# Altium PCB ADG904_pcb.PcbDoc
Units mm, origin at the board's own origin, x right, y up, seen from the top; angles counter-clockwise.
Board outline 13.4 x 13.4 mm, 4 copper layers (Top Layer, Layer 1, Layer 2, Bottom Layer 1), stack 0.775 mm thick; 9 components, 8 nets, 38 pads, 55 vias.
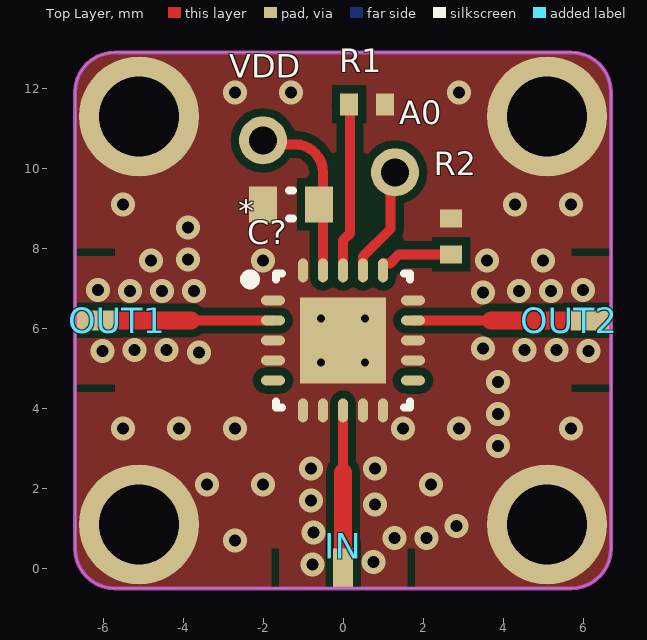
[diagram p0: Top Layer view]
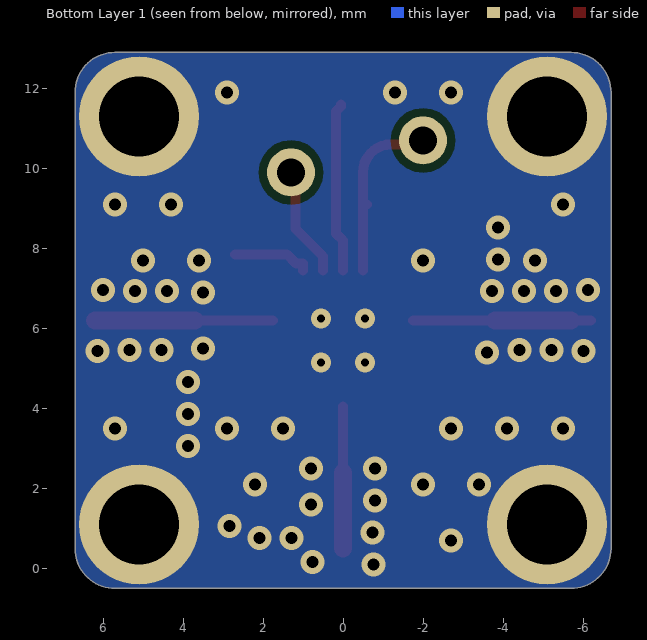
[diagram p1: Bottom Layer 1 view, seen from below]
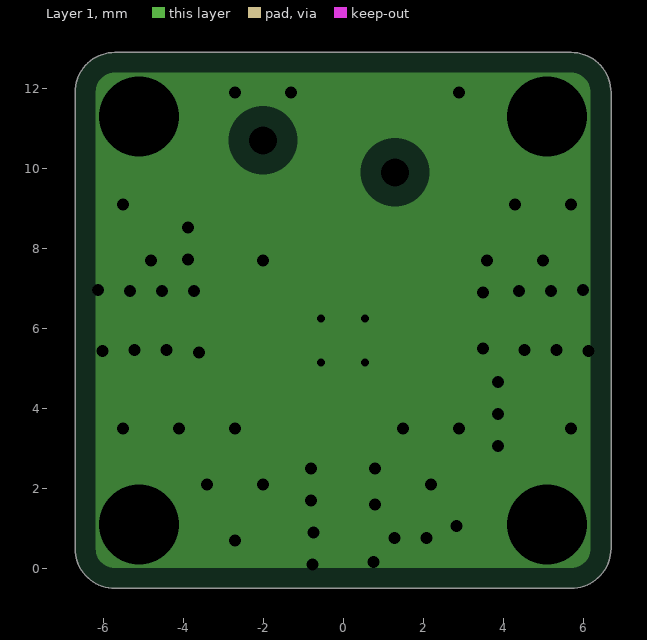
[diagram p2: Layer 1, clearances drawn from the general rule]
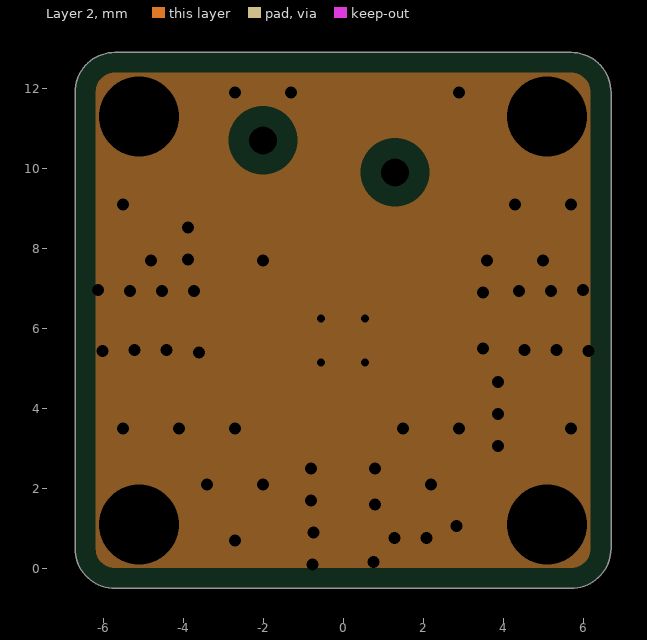
[diagram p3: Layer 2, clearances drawn from the general rule]

## Layer stack, top to bottom
Top Solder: solder mask 0.0102, Solder Resist, Dk 3.5
Top Layer: signal copper 0.035
Dielectric 2: prepreg 0.254, PP-006, Dk 4.1
Layer 1: plane copper 0.035, net GND
Dielectric 1: dielectric 0.127, FR-4, Dk 4.8
Layer 2: plane copper 0.035, net GND
Dielectric 3: prepreg 0.254, PP-006, Dk 4.1
Bottom Layer 1: signal copper 0.035
Bottom Solder: solder mask 0.0102, Solder Resist, Dk 3.5

## Board outline
-6.7,0.5 -6.7,11.9 cw(c-5.7,11.9) -5.7,12.9 5.7,12.9 cw(c5.7,11.9) 6.7,11.9 6.7,0.5 cw(c5.7,0.5) 5.7,-0.5 -5.7,-0.5 cw(c-5.7,0.5)

## Design rules (kind name [scope] priority, off if disabled: settings)
Clearance [All] p1: gap=0.2 ignorepadtopadclearanceinfootprint=FALSE
HoleSize [All] p1: absolutevalues=TRUE maxlimit=5 minlimit=0.3 maxpercent=80.000 minpercent=20.000
PlaneClearance [All] p1: clearance=0.508
PlaneConnect [All] p1: planeconnectstyle=Direct reliefexpansion=0.508 reliefentries=4 reliefconductorwidth=0.254 reliefairgap=0.254
PolygonConnect [All] p1: connectstyle=Direct reliefconductorwidth=0.254 reliefentries=4 polygonreliefangle="90 Angle" airgapwidth=0.254
RoutingVias [All] p1: holewidth=0.711 width=1.27 viastyle="Through Hole" minholewidth=0.711 minwidth=1.27 maxholewidth=0.711 maxwidth=1.27 useviatemplates=TRUE viatemplateguid#1={4417187F-98E7-48E9-A77D-D507A8F96CD3} viatemplatename#1=v60h30m0mx0
SolderMaskExpansion [All] p1: expansion=0.102
Width Width_50ohm [InNetClass('50ohm')] p1: maxlimit=0.45 minlimit=0.45 preferedwidth=0.45 impedanceprofiledriven=TRUE impedanceprofileid={D2B77361-9B7D-4BD5-B69E-70E315500705} impedanceprofilevalue=50.000000 minimp=50.000000 maximp=50.000000 favimp=50.000000 checkconnectedcopper=TRUE
Width [All] p2: maxlimit=5 minlimit=0.2 preferedwidth=0.2
27 further rules are at their usual default settings.

## Components (designator, comment, footprint, x,y, rotation, side; value= is the part's Value field where it differs from the comment)
* "ADG904BCPZ" QFN50P400X400X80_HS-21N 0,5.7 r0 top
A0 "" "New footprint 1" 1.3,9.9 r0 top
C? "10uF" CAPC0603(1608)55_L -1.3,9.1 r180 top
IN "X-CONNECTOR" X-CONNECTOR-PCB -5.1,1.1 r90 top
OUT1 "X-CONNECTOR" X-CONNECTOR-PCB -5.1,11.3 r0 top
OUT2 "X-CONNECTOR" X-CONNECTOR-PCB 5.1,1.1 r180 top
R1 "4K7" 0402-RES-HD 0.6,11.6 r0 top value=4.7K
R2 "4K7" 0402-RES-HD 2.7,8.3 r90 top value=4.7K
VDD "" "New footprint 1" -2,10.7 r90 top

## Footprints (in the part's own frame and the unit in brackets; to place one, negate y for a bottom-side part, rotate by r counter-clockwise, add the part's x,y. Pads: shape width x height; smd on the part's side, far side on the other; paste and mask are expansions set on the pad)
0402-RES-HD [mm] "Chip Resistor, Body 1.0x0.5mm, IPC High Density"
  rect 0.45x0.55 smd: 1(-0.45,0) 2(0.45,0)
  body extent -0.52,-0.27 0.53,0.28, height 0.4
CAPC0603(1608)55_L [mm] "Chip Capacitor, Body 1.6x0.8mm, Height 0.55mm, IPC High Density"
  rect 0.7x0.9 smd: 1(-0.7,0) 2(0.7,0)
  silkscreen extent -0.05,-0.35 0.05,0.35, body extent -0.87,-0.47 0.88,0.48, height 0.55
"New footprint 1" [mm]
  round 1.2 hole 0.7: 1(0,0)
QFN50P400X400X80_HS-21N [mm] "QFN, 20-Leads, Body 4,00x4,00mm, Pitch 0,50mm, Thermal Pad 2,15x2,15mm, IPC Medium Density"
  oval 0.6x0.25 smd: 1(-1.75,1) 2(-1.75,0.5) 3(-1.75,0) 4(-1.75,-0.5) 5(-1.75,-1) 11(1.75,-1) 12(1.75,-0.5) 13(1.75,0) 14(1.75,0.5) 15(1.75,1)
  oval 0.25x0.6 smd: 6(-1,-1.75) 7(-0.5,-1.75) 8(0,-1.75) 9(0.5,-1.75) 10(1,-1.75) 16(1,1.75) 17(0.5,1.75) 18(0,1.75) 19(-0.5,1.75) 20(-1,1.75)
  rect 2.15x2.15 smd: 21(0,0)
  silkscreen extent -2.45,-1.68 1.68,1.67, body extent -2.05,-2.05 2.05,2.05, height 0.8
X-CONNECTOR-PCB [mm]
  rect 1x0.5 smd: 1(-1.1,-5.1)
  round 3 hole 2: M1(0,0) M2(0,-10.2)
  Top Layer pour cut-out: -1.616,-3.576
  Top Layer pour cut-out: -1.6,-3.5 -0.6,-3.5 -0.6,-3.3 -1.6,-3.3
  Top Layer pour cut-out: -0.6,-6.7 -1.6,-6.7 -1.6,-6.9 -0.6,-6.9

## Part data
*: library part ADG904BCPZ-01.A.1, "RF Switch ICs WB 2.5GHz 37dB Iso CMOS 4:1 Mux/SP4T", Capacitance=2E-12F
A0 VDD: library part TEST_VIA_RF-01.A.1, "Test VIA for RF circuits"
C?: library part C0603-10uF-16V-1, "CAP CER 10UF 16V X5R 0603", Part No=EMK107BBJ106MA-T, Cod EMS=05.281.019.592
IN OUT1 OUT2: library part X-CONNECTOR-5, "CONECTOR PARA MÓDULOS X MICROWAVE", Mount=TH, RoHS=Yes
R1 R2: library part R0402-4K7-6, "RES 4.7K OHM 1/10W 1% 0402 SMD", Part No=ERJ-2RKF4701X, Cod EMS=05.280.029.526, Family=ERJ-2RKF....X, Family Description="RESISTOR FILME ESPESSO 10R-1M / 1/10W / 1% / 0402. P/N: ERJ-2RKF....X – PANASONIC ELECTRONIC COMPONENTS."

## Via types
v1: diameter 0.6, hole 0.3, Top Layer to Bottom Layer 1, tented both sides, 31 vias
v2: diameter 0.6, hole 0.3, Top Layer to Bottom Layer 1, 20 vias
v3: diameter 0.5, hole 0.2, Top Layer to Bottom Layer 1, 4 vias

## Nets (pads, with @x,y where several pads share a name; then routed paths per layer and width w, separated by ;. In a path a pad name is that pad's centre, name@x,y a point inside that pad or via, vN(x,y) a via of type N, cw(c..) or ccw(c..) an arc to the next point about the centre after c; other vN are vias at no path point)
GND: *.1 *.3 *.4 *.6 *.7 *.9 *.10 *.12 *.13 *.15 *.20 *.21 C?.2 IN.M1 IN.M2 OUT1.M1 OUT1.M2 OUT2.M1 OUT2.M2 R1.2 R2.2
  other v1: -0.76,0.096 0.76,0.161 1.289,0.761 2.089,0.764 -0.739,0.895 2.835,1.053 0.8,1.6 -0.8,1.7 -0.8,2.5 0.8,2.5 3.875,3.065 3.875,3.865 3.875,4.665 -3.6,5.4 -6.007,5.44 6.135,5.44 -5.207,5.461 -4.407,5.461 4.535,5.461 5.335,5.461 3.5,5.5 3.5,6.9 -5.328,6.939 -4.528,6.939 -3.728,6.939 4.399,6.939 5.199,6.939 -6.128,6.96 5.999,6.96 -3.875,7.726 -3.875,8.526
  other v2: -2.7,0.7 -3.4,2.1 -2,2.1 2.2,2.1 -5.5,3.5 -4.1,3.5 -2.7,3.5 1.5,3.5 2.9,3.5 5.7,3.5 -4.8,7.7 -2,7.7 3.6,7.7 5,7.7 -5.5,9.1 4.3,9.1 5.7,9.1 -2.7,11.9 -1.3,11.9 2.9,11.9
  other v3: -0.55,5.15 0.55,5.15 -0.55,6.25 0.55,6.25
Net*_2: *.2 OUT1.1 | length 6.4
  Top Layer w0.255: OUT1.1 *.2
  Top Layer w0.45: -5.7,6.2 -3.8,6.2
Net*_8: *.8 IN.1 | length 3.5
  Top Layer w0.255: 0,2.4 *.8@0,4.05
  Top Layer w0.45: 0,0.5 0,1.113 0,2.4
Net*_14: *.14 OUT2.1 | length 4.6
  Top Layer w0.255: *.14 3.7,6.2 ; OUT2.1@6.1,6.3 OUT2.1
  Top Layer w0.45: 3.7,6.2 4.1,6.2 OUT2.1
Net*_16: *.16 R2.1 | length 2
  Top Layer w0.255: *.16 1,7.62 1.17,7.62 1.4,7.85 R2.1
Net*_17: *.17 A0.1 | length 2.8
  Top Layer w0.255: *.17 0.5,7.8 1.185,8.485 1.185,9.785 A0.1
Net*_18: *.18 R1.1 | length 4.3
  Top Layer w0.255: *.18 0,8.2 0.178,8.378 0.178,11.422 0.05,11.55 R1.1@0.05,11.6
Net*_19: *.19 C?.1 VDD.1 | length 4.3
  Top Layer w0.255: VDD.1@-2,10.6 -1.2,10.6 cw(c-1.2,9.9) -0.5,9.9 *.19
pads on no net: *.5 *.11

## Polygon pours and split planes (outlines as drawn)
GND on Bottom Layer 1 "Bottom Layer 1-GND" (solid, pour order 3): -5.7,-0.5 cw(c-5.7,0.5) -6.7,0.5 -6.7,11.9 cw(c-5.7,11.9) -5.7,12.9 5.7,12.9 cw(c5.7,11.9) 6.7,11.9 6.7,0.5 cw(c5.7,0.5) 5.7,-0.5
GND on Top Layer "Top Layer-GND" (solid, pour order 5): -5.7,-0.5 cw(c-5.7,0.5) -6.7,0.5 -6.7,11.9 cw(c-5.7,11.9) -5.7,12.9 5.7,12.9 cw(c5.7,11.9) 6.7,11.9 6.7,0.5 cw(c5.7,0.5) 5.7,-0.5
GND on Layer 1 (split plane): 5.796,12.382 5.888,12.354 5.973,12.309 6.048,12.248 6.109,12.173 6.154,12.088 6.182,11.996 6.191,11.912 6.19,11.9 6.19,0.5 6.191,0.488 6.182,0.404 6.154,0.312 6.109,0.227 6.048,0.152 5.973,0.091 5.888,0.046 5.796,0.018 5.712,0.009 5.7,0.01 -5.7,0.01 -5.712,0.009 -5.796,0.018 -5.888,0.046 -5.973,0.091 -6.048,0.152 -6.109,0.227 -6.154,0.312 -6.182,0.404 -6.191,0.488 -6.19,0.5 -6.19,11.9 -6.191,11.912 -6.182,11.996 -6.154,12.088 -6.109,12.173 -6.048,12.248 -5.973,12.309 -5.888,12.354 -5.796,12.382 -5.712,12.391 -5.7,12.39 5.7,12.39 5.712,12.391
GND on Layer 2 (split plane): 5.796,12.382 5.888,12.354 5.973,12.309 6.048,12.248 6.109,12.173 6.154,12.088 6.182,11.996 6.191,11.912 6.19,11.9 6.19,0.5 6.191,0.488 6.182,0.404 6.154,0.312 6.109,0.227 6.048,0.152 5.973,0.091 5.888,0.046 5.796,0.018 5.712,0.009 5.7,0.01 -5.7,0.01 -5.712,0.009 -5.796,0.018 -5.888,0.046 -5.973,0.091 -6.048,0.152 -6.109,0.227 -6.154,0.312 -6.182,0.404 -6.191,0.488 -6.19,0.5 -6.19,11.9 -6.191,11.912 -6.182,11.996 -6.154,12.088 -6.109,12.173 -6.048,12.248 -5.973,12.309 -5.888,12.354 -5.796,12.382 -5.712,12.391 -5.7,12.39 5.7,12.39 5.712,12.391

## Keep-outs
Top Layer:
  the board outline again, w0.1

## Silkscreen, mask and mechanical layers (free items; w line width, h text height)
Mechanical 1:
  lines w0.2: -5.7,12.9 ccw(c-5.7,11.9) -6.7,11.9 -6.7,0.5 ccw(c-5.7,0.5) -5.7,-0.5 5.7,-0.5 ccw(c5.7,0.5) 6.7,0.5 6.7,11.9 ccw(c5.7,11.9) 5.7,12.9 ; -5.6,12.4 5.8,12.4